# Altium PCB STM32F103C8T6.PcbDoc
Units mm, origin at the board's own origin, x right, y up, seen from the top; angles counter-clockwise.
Board outline 63.9 x 36.3 mm, 2 copper layers (Top Layer, Bottom Layer); 36 components, 50 nets, 189 pads, 28 vias.
Unrouted connection lines stored in the file: 1.
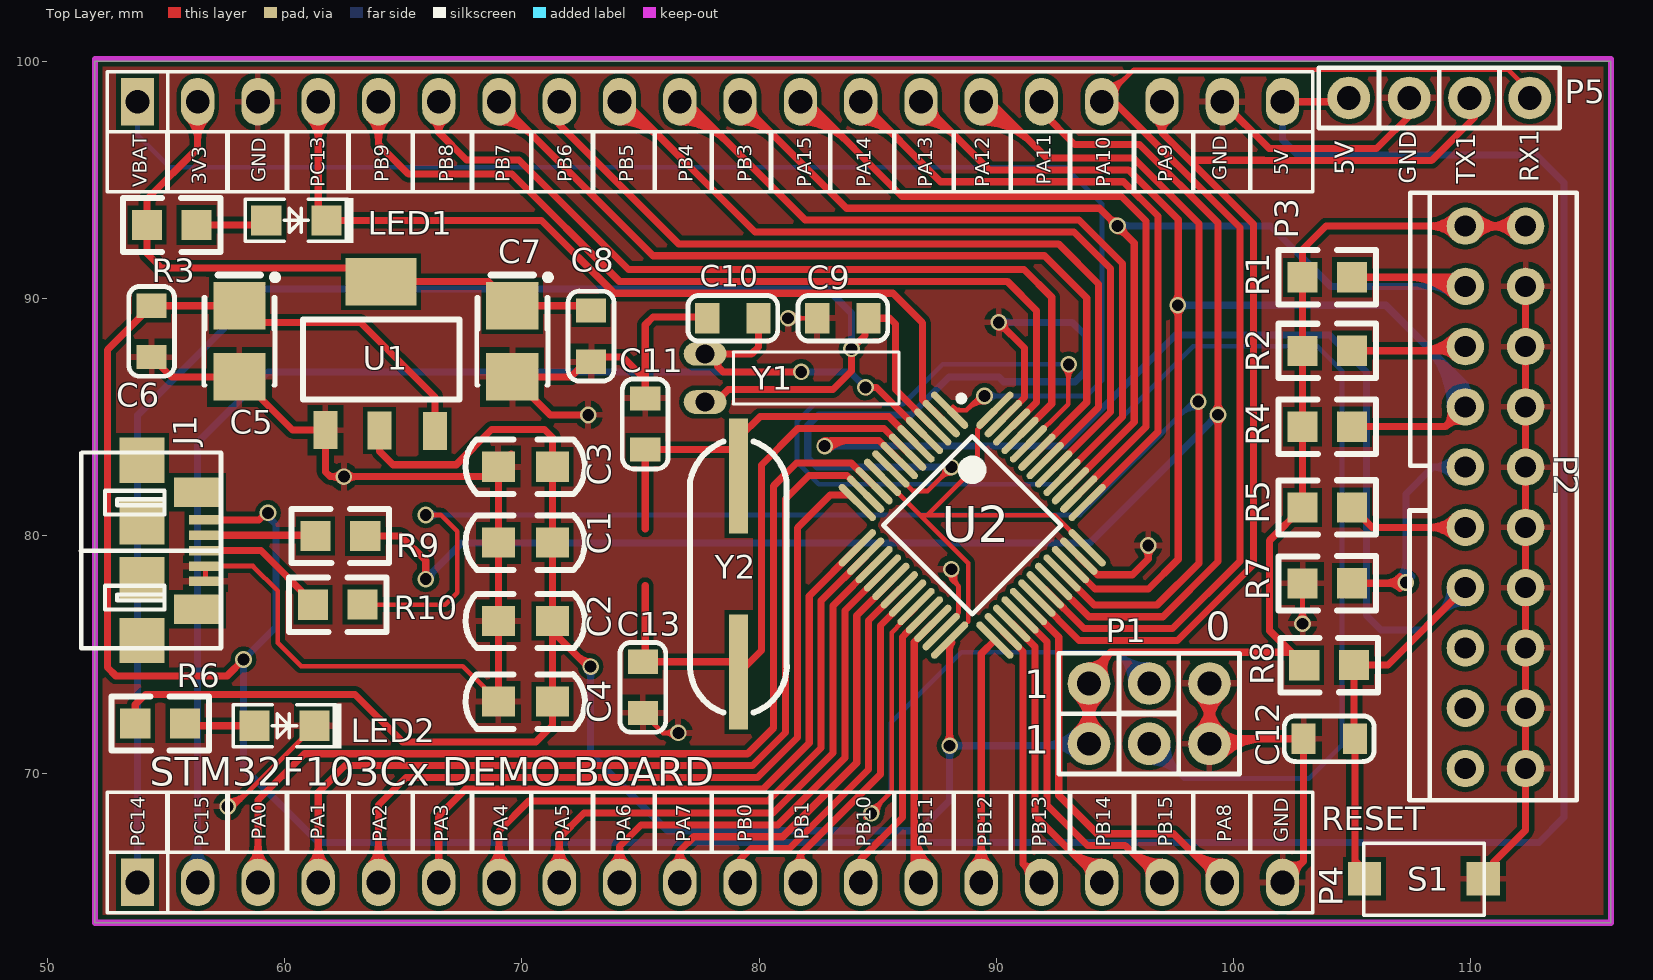
[diagram p0: Top Layer view]
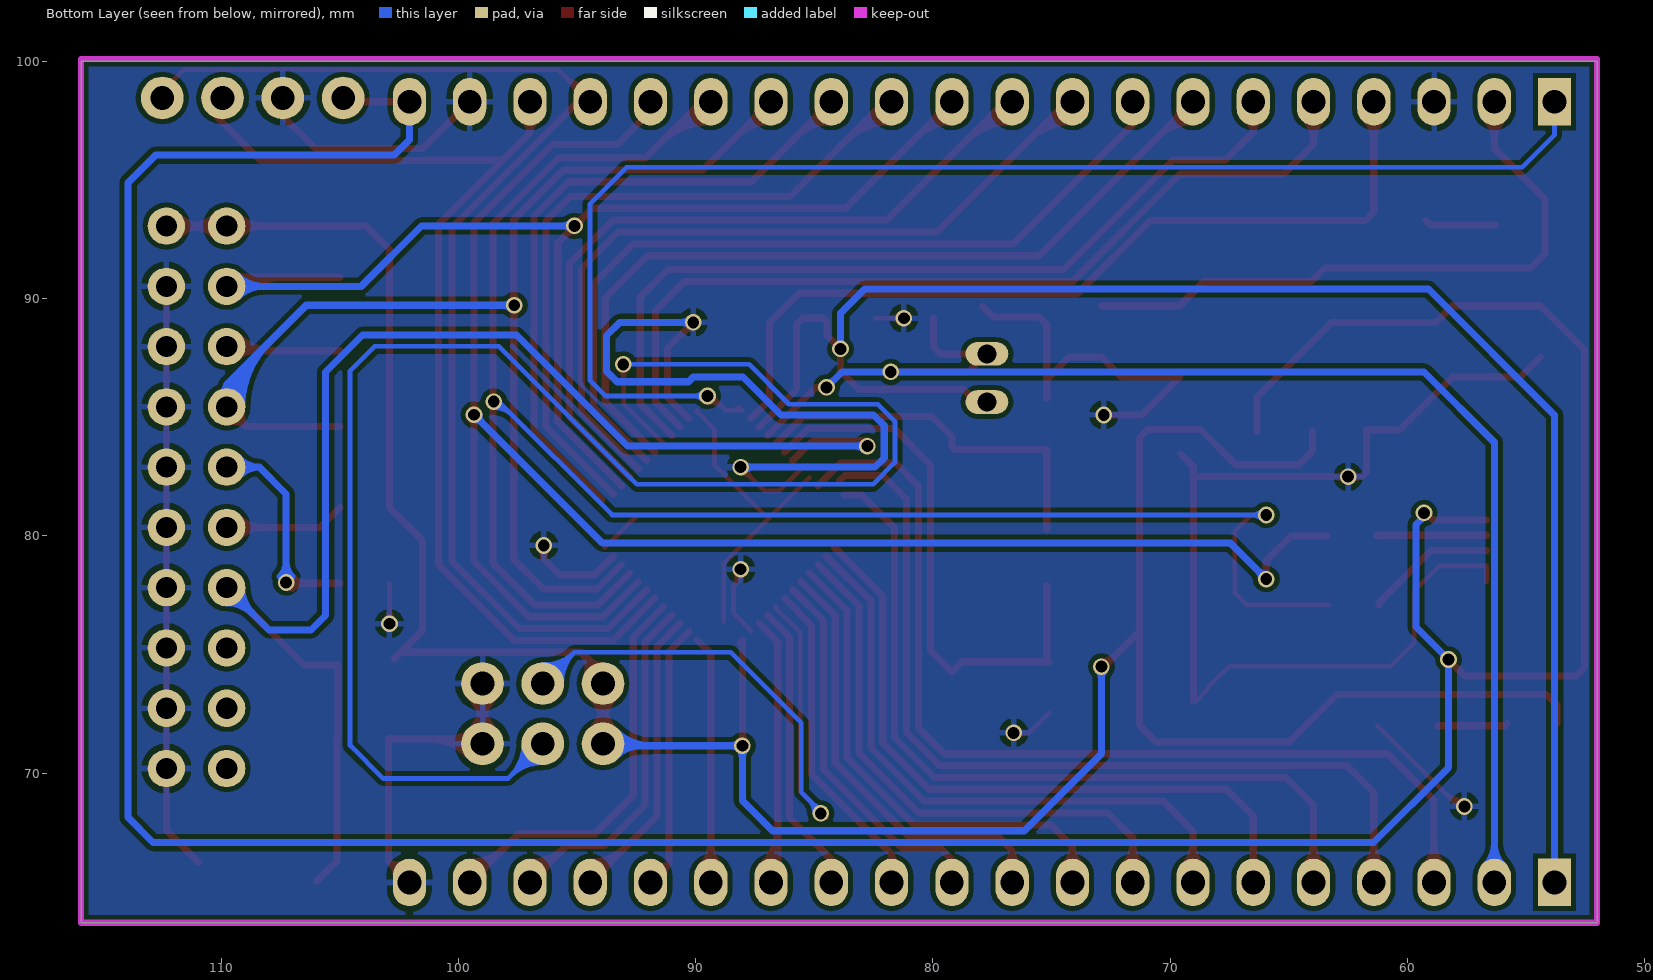
[diagram p1: Bottom Layer view, seen from below]
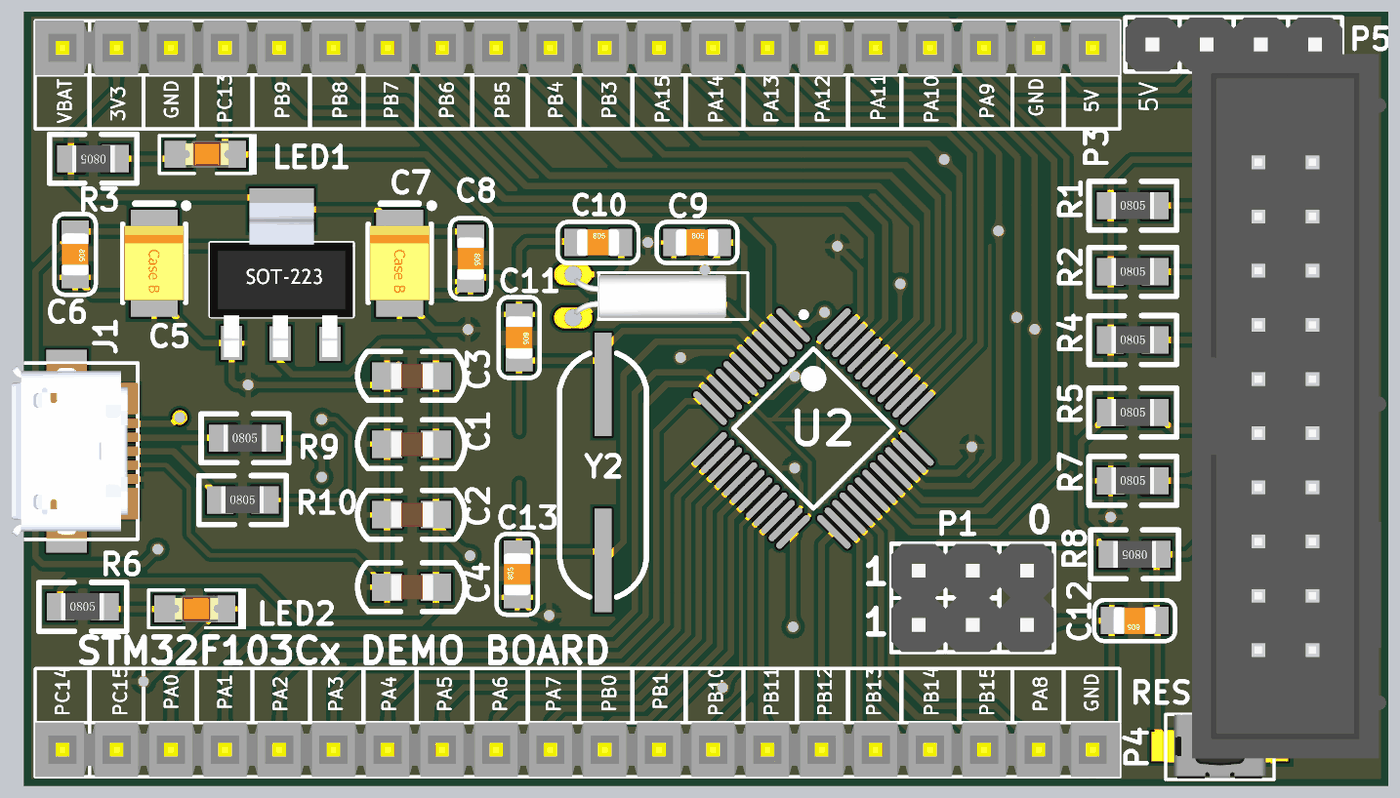
[diagram p2: 3D render of the assembled board from above, using the file's embedded part models]

## Layer stack, top to bottom
Top Solder: solder mask 0.0102, Solder Resist, Dk 3.5
Top Layer: signal copper 0.0356
Dielectric 1: dielectric 0.32, FR-4, Dk 4.8
Bottom Layer: signal copper 0.0356
Bottom Solder: solder mask 0.0102, Solder Resist, Dk 3.5

## Board outline
52.003,63.7 115.9,63.7 115.9,100 52.003,100

## Design rules (kind name [scope] priority, off if disabled: settings)
Clearance [All] p1: gap=0.2 ignorepadtopadclearanceinfootprint=FALSE except(0: Arc-Hole Track-Hole SMDPad-Hole THPad-Hole Via-Hole Fill-Hole Poly-Hole Region-Hole Text-Hole)
ComponentClearance [All] p1 off: gap=0.254 collisioncheckmode=3 verticalgap=0.254 showdistances=FALSE
PolygonConnect [All] p1: connectstyle=Relief reliefconductorwidth=0.254 reliefentries=4 polygonreliefangle="90 Angle" airgapwidth=0.254
RoutingVias [All] p1: holewidth=0.711 width=1.27 viastyle="Through Hole" minholewidth=0.711 minwidth=1.27 maxholewidth=0.711 maxwidth=1.27
SolderMaskExpansion [All] p1: expansion=0.102
Width [All] p1: maxlimit=0.7 minlimit=0.2 preferedwidth=0.3
29 further rules are at their usual default settings.

## Components (designator, comment, footprint, x,y, rotation, side; value= is the part's Value field where it differs from the comment)
C1 "104" 0805C 70.154,79.718 r180 top
C2 "104" 0805C 70.154,76.418 r180 top
C3 "104" 0805C 70.154,82.918 r180 top
C4 "104" 0805C 70.154,73.018 r180 top
C5 "10pF" SMT_C_Tantalum_B 58.1,88.2 r270 top
C6 "104" 0805-0C 54.4,89.7 r270 top
C7 "10pF" SMT_C_Tantalum_B 69.6,88.2 r270 top
C8 "104" 0805-0C 72.918,89.503 r270 top
C9 "20pF" 0805-0C 82.449,89.175 r0 top
C10 "20pF" 0805-0C 77.814,89.175 r0 top
C11 "20pF" 0805-0C 75.2,85.8 r270 top
C12 "104" 0805-0C 105.106,71.454 r180 top
C13 "20pF" 0805-0C 75.1,72.541 r90 top
J1 "USB-Micro" USB-MICRO贴片 55.334,79.393 r270 top
LED1 "SMT_LED_0805" 0805LED1 60.5,93.3 r0 top
LED2 "SMT_LED_0805" 0805LED1 60,72 r0 top
P1 "BOOT" 2.54排针2X3 93.899,71.242 r0 top
P2 "JTAG" 2.54简易牛角座20P 109.76,93.06 r270 top
P3 "Header20" 2.54排针1X20 53.8,98.3 r0 top
P4 "Header20" 2.54排针1X20 53.8,65.4 r0 top
P5 "Header4" 2.54排针1X4 104.854,98.458 r180 top
R1 "10K" R0805 102.9,90.9 r0 top
R2 "10K" R0805 102.9,87.8 r0 top
R3 "1K" R0805 56.29,93.105 r180 top
R4 "10K" R0805 102.9,84.6 r0 top
R5 "10K" R0805 102.9,81.2 r0 top
R6 "1K" R0805 53.71,72.095 r0 top
R7 "10K" R0805 102.9,78 r0 top
R8 "10K" R0805 105.063,74.557 r180 top
R9 "20R" R0805 61.31,79.995 r0 top
R10 "20R" R0805 61.2,77.1 r0 top
S1 "SW-PB" 按键微动开关2 108.017,65.532 r180 top
U1 "AMS1117" AMS1117 64.2,87.5 r0 top
U2 "STM32F103C8T6" LQF48_M 88.982,80.455 r315 top
Y1 "XTAL 32.768" AT26 80.389,86.669 r0 top
Y2 "8MHz" TP_8M 79.127,78.398 r90 top

## Footprints (in the part's own frame and the unit in brackets; to place one, negate y for a bottom-side part, rotate by r counter-clockwise, add the part's x,y. Pads: shape width x height; smd on the part's side, far side on the other; paste and mask are expansions set on the pad)
2.54排针1X4 [mm]
  round 1.8 hole 1: 1(-7.62,0) 2(-5.08,0) 3(-2.54,0) 4(0,0)
  silkscreen extent -8.89,-1.27 1.27,1.27, body extent -8.89,-1.27 1.27,1.27, height 2.5
2.54排针1X20 [mm]
  rect 1.4x2 hole 1: 1(0,0)
  oval 1.4x2 hole 1: 2(2.54,0) 3(5.08,0) 4(7.62,0) 5(10.16,0) 6(12.7,0) 7(15.24,0) 8(17.78,0) 9(20.32,0) 10(22.86,0) 11(25.4,0) 12(27.94,0) 13(30.48,0) 14(33.02,0) 15(35.56,0) 16(38.1,0) 17(40.64,0) 18(43.18,0) 19(45.72,0) 20(48.26,0)
  silkscreen extent -1.27,-1.27 49.53,1.27, body extent -1.27,-1.27 49.53,1.27, height 8.89
2.54排针2X3 [mm]
  round 1.8 hole 1: 1(0,0) 2(0,2.54) 3(2.54,0) 4(2.54,2.54) 5(5.08,2.54) 6(5.08,0)
  silkscreen extent -1.27,-1.27 6.35,3.81, body extent -1.27,-1.27 6.35,3.81, height 2.5
2.54简易牛角座20P [mil]
  round 62 hole 35: 1(0,0) 2(0,100) 3(100,0) 4(100,100) 5(200,0) 6(200,100) 7(300,0) 8(300,100) 9(400,0) 10(400,100) 11(500,0) 12(500,100) 13(600,0) 14(600,100) 15(700,0) 16(700,100) 17(800,0) 18(800,100) 19(900,0) 20(900,100)
  silkscreen extent -55,-93 953,185, body extent -195,-120 1105,238, height 344
0805-0C [mil]
  rect 40x50 smd: 1(0,0) 2(85,0)
  silkscreen extent -32,-38 117,38, body extent 3,-25 82,25, height 30
0805C [mil]
  rect 55x50 smd: 1(-45,0) 2(45,0)
  silkscreen extent -99,-45 99,45, body extent -40,-24 38,24, height 37
0805LED1 [mm]
  rect 1.27x1.27 smd: 1(-1.27,0) 2(1.27,0)
  silkscreen extent -2.16,-0.95 2.4,0.95, body extent -0.93,-0.62 1.09,0.64, height 1.1
AMS1117 [mm]
  rect 1x1.6 smd: 1(-2.475,-3.041) 2(-0.2,-3.058) 3(2.142,-3.071)
  rect 3x2 smd: 2(-0.129,3.216)
  silkscreen extent -3.43,-1.75 3.17,1.63, body extent -3.48,-3.68 3.22,3.52, height 1.85
AT26 [mm]
  oval 1.8x1 hole 0.8: 1(-2.667,-1.025) 2(-2.667,1.007)
  silkscreen extent -1.53,-1.11 5.51,1.09, body extent -2.62,-1.03 4.52,0.97, height 2.4
LQF48_M [mm]
  oval 2.1x0.3 smd: 1(-4.1,2.75) 2(-4.1,2.25) 3(-4.1,1.75) 4(-4.1,1.25) 5(-4.1,0.75) 6(-4.1,0.25) 7(-4.1,-0.25) 8(-4.1,-0.75) 9(-4.1,-1.25) 10(-4.1,-1.75) 11(-4.1,-2.25) 12(-4.1,-2.75) 25(4.1,-2.75) 26(4.1,-2.25) 27(4.1,-1.75) 28(4.1,-1.25) 29(4.1,-0.75) 30(4.1,-0.25) 31(4.1,0.25) 32(4.1,0.75) 33(4.1,1.25) 34(4.1,1.75) 35(4.1,2.25) 36(4.1,2.75)
  oval 0.3x2.1 smd: 13(-2.75,-4.1) 14(-2.25,-4.1) 15(-1.75,-4.1) 16(-1.25,-4.1) 17(-0.75,-4.1) 18(-0.25,-4.1) 19(0.25,-4.1) 20(0.75,-4.1) 21(1.25,-4.1) 22(1.75,-4.1) 23(2.25,-4.1) 24(2.75,-4.1) 37(2.75,4.1) 38(2.25,4.1) 39(1.75,4.1) 40(1.25,4.1) 41(0.75,4.1) 42(0.25,4.1) 43(-0.25,4.1) 44(-0.75,4.1) 45(-1.25,4.1) 46(-1.75,4.1) 47(-2.25,4.1) 48(-2.75,4.1)
  silkscreen extent -4.22,-2.65 2.65,3.57, body extent -3.5,-3.5 3.5,3.5, height 1.6
R0805 [mm] "1/8W"
  rect 1.27x1.27 smd: 1(0,0) 2(2.09,0.005)
  silkscreen extent -1.01,-1.14 3.1,1.15, body extent 0.04,-0.62 2.04,0.64, height 0.55
SMT_C_Tantalum_B [mm]
  rect 2x2.2 smd: 1(-1.5,0) 2(1.5,0)
  silkscreen extent -2.82,-1.5 1.85,1.63, body extent -1.75,-1.4 1.75,1.4, height 1.9
TP_8M [mm]
  rect 4.85x0.8 smd: 1(-4.125,0) 2(4.125,0)
  silkscreen extent -5.84,-2.04 5.59,2.03, body extent -5.8,-2.4 5.8,2.4, height 4
USB-MICRO贴片 [mm]
  rect 1.9x1.9 smd: 0(-3.797,-1.334) 0(-1.206,-1.334) 0(1.232,-1.333) 0(3.797,-1.333)
  rect 1.25x2 smd: 0(-2.451,1.003) 0(2.476,1.003)
  rect 0.4x1.4 smd: 1(-1.283,1.333) 2(-0.635,1.333) 3(0.013,1.333) 4(0.66,1.334) 5(1.308,1.334)
  silkscreen extent -4.13,-3.91 4.13,1.99, body extent -4.1,-3.91 4.1,2.02, height 2.77
按键微动开关2 [mm]
  rect 1.4x1.4 / inner round 0 / far side round 0 all layers, no hole: 1(-2.5,-0.024) 2(2.5,-0.024)
  silkscreen extent -2.54,-1.52 2.54,1.52, body extent -2.5,-1.52 2.5,1.48, height 2.1

## Part data
C1 C2 C3 C4: library part C0805
C5 C7: library part SMT_C_Tantalum_B, "Capacitor, SM Tantalum; Body 3.5 x 2.8 mm (LxW typ)"
C6 C8 C9 C10 C11 C12 C13: library part SMT_C_0805, "Surface mount capacitor 0805"
LED1 LED2: "SMT LED"
P1: library part PIN-6
P2: library part PIN-20
P3 P4: library part SIP-20
P5: library part SIP-4
R1 R2 R3 R4 R5 R6 R7 R8 R9 R10: library part R0805
S1: library part 微动开关2P
U2: "ARM 32bit LQFP48"
Y2: library part XTAL

## Via types
v1: diameter 0.7, hole 0.5, Top Layer to Bottom Layer, tented both sides, 26 vias
v2: diameter 0.7, hole 0.5, Top Layer to Bottom Layer, 2 vias

## Nets (pads, with @x,y where several pads share a name; then routed paths per layer and width w, separated by ;. In a path a pad name is that pad's centre, name@x,y a point inside that pad or via, vN(x,y) a via of type N, cw(c..) or ccw(c..) an arc to the next point about the centre after c; other vN are vias at no path point)
5V: C5.1 C6.1 J1.1 P3.20 P5.4 U1.3 | length 152.3
  Top Layer w0.3: J1.1 58.927,80.676 59.222,80.971 v2(59.302,80.971) ; v1(58.272,74.794) 57.584,74.106 52.888,74.106 52.544,74.45 52.544,87.844 C6.1 C5.1 58.8,89 63.2,89 66.342,85.858 U1.3 ; P3.20 104.806,98.3 P5.4@104.848,98.342
  Bottom Layer w0.3: v2@59.312,80.811 59.642,80.482 59.642,76.164 v1(58.272,74.794) 58.272,70.235 61.43,67.077 112.859,67.077 113.912,68.13 113.912,94.896 112.762,96.047 102.709,96.047 102.06,96.695 P3.20
BOOT0: P1.3 U2.44 | length 77.6
  Top Layer w0.2: U2.44 93.026,85.56 93.026,87.063 v1@93.215,87.252 ; v1@92.866,87.051 cw(c92.48,86.665) 93.026,86.665 ; v1@92.941,87.125 cw(c92.735,86.92) v1@93.026,86.92 ; 93.026,86.564 cw(c93.715,86.564) v1@93.228,87.051
  Bottom Layer w0.2: v1(93.047,87.231) 87.745,87.231 86.064,85.55 82.314,85.55 81.6,84.836 81.6,83.097 82.522,82.175 92.471,82.175 98.289,87.993 103.53,87.993 104.564,86.959 104.564,71.171 103.166,69.774 97.908,69.774 P1.3 ; P1.3@96.439,70.442 cw(c96.439,68.511) 97.805,69.877 cw(c99.171,71.242) P1.3@97.239,71.242 ; P1.3@96.439,70.642 cw(c96.439,69.194) 97.464,70.218 cw(c98.488,71.242) P1.3@97.039,71.242 ; P1.3@96.439,70.842 cw(c96.439,69.877) 97.122,70.559 cw(c97.805,71.242) P1.3@96.839,71.242
BOOT1: P1.4 U2.20 | length 35.1
  Top Layer w0.2: v1@84.468,68.124 84.656,68.312 v1(84.726,68.312) 84.726,68.382 85.587,69.243 85.587,75.929 86.014,76.355 86.613,76.955 U2.20 ; v1@84.726,68.567 ccw(c84.726,69.015) 85.042,68.699 ; v1@84.981,68.312 cw(c85.768,68.312) 85.212,68.868
  Bottom Layer w0.2: v1(84.726,68.312) 84.726,68.382 85.543,69.199 85.543,72.12 88.519,75.096 95.112,75.096 ; v1@84.726,68.567 ccw(c84.726,69.015) 85.042,68.699 ; v1@84.981,68.312 cw(c85.768,68.312) 85.212,68.868 ; 95.438,74.769 ccw(c96.375,75.707) P1.4@96.419,74.382 ; 95.446,74.761 cw(c94.497,73.812) P1.4@95.839,73.791 ; P1.4@95.639,73.794 ccw(c93.838,73.822) 95.112,75.095 ; 95.764,74.443 ccw(c96.396,75.076) P1.4@96.426,74.182 ; 95.781,74.427 cw(c95.155,73.802) P1.4@96.039,73.788 ; P1.4@96.413,74.582 cw(c96.355,76.338) 95.112,75.095 ; P1.4 96.425,73.782 95.112,75.096
GND: C1.2 C2.2 C3.2 C4.2 C5.2 C6.2 C7.2 C8.2 C9.1 C10.1 C11.1 C12.2 C13.1 J1.4 J1.5 LED2.2 P1.5 P1.6 P2.4 P2.6 P2.8 P2.10 P2.12 P2.14 P2.16 P2.18 P2.20 P3.3 P3.19 P4.20 P5.3 R7.1 S1.1 U1.1 U2.8 U2.23 U2.35 U2.47 | length 186.3
  Top Layer w0.2: J1.5 J1.4 58.67,78.733 59.717,77.686 59.717,75.493 60.698,74.512 67.516,74.512 68.412,73.616 68.412,73.553 68.947,73.018 C4.2 ; v1(57.6,68.6) 57.87,68.6 LED2.2 ; v1@57.6,68.656 ccw(c57.6,69.442) 58.156,68.886 ; v1@57.6,68.856 ccw(c57.6,70.125) 58.497,69.227 ; C13.1 75.941,71.7 v1(76.6,71.7) ; v1@76.419,71.519 ccw(c75.983,71.083) 75.983,71.7 ccw(c75.983,72.317) v1@76.419,71.881 ; v1(81.225,89.175) C9.1 ; v1@81.406,88.994 cw(c81.842,88.558) 81.842,89.175 cw(c81.842,89.792) v1@81.406,89.356 ; U2.8 86.476,81.9 87.1,81.9 v1(88.1,82.9) ; U2.23 87.674,76.036 88.407,76.768 88.407,77.874 ; v1@87.844,82.9 cw(c87.227,82.9) 87.664,82.464 cw(c88.1,82.027) v1@88.1,82.644 ; v1@87.983,78.373 cw(c87.884,78.181) 88.1,78.181 ; v1(88.1,78.6) 88.1,78.181 ; v1@88.149,78.573 ccw(c88.522,78.364) 88.22,78.061 ; v1@88.217,78.373 ccw(c88.316,78.181) 88.1,78.181 ; v1@88.323,78.475 ccw(c88.762,78.23) 88.407,77.874 ; v1@102.719,76.481 ccw(c102.283,76.917) 102.9,76.917 ccw(c103.517,76.917) v1@103.081,76.481 ; v1@102.9,76.1 v1(102.9,76.3) R7.1 ; 88.1,78.181 88.407,77.874
  Top Layer w0.3: C6.2 55.241,86.7 C5.2 60.341,84.459 U1.1 61.725,82.7 61.925,82.5 C3.2@69.011,82.5 ; v1@62.355,82.355 ccw(c62.004,82.004) 62.004,82.5 ccw(c62.004,82.996) v1@62.355,82.645 ; v1@62.645,82.355 cw(c62.996,82.004) 62.996,82.5 cw(c62.996,82.996) v1@62.645,82.645 ; C4.2 C2.2 C1.2 C3.2@69.011,82.5 ; C3.2@69.057,82.5 C3.2@69.011,82.5 ; C3.2@69.554,83.461 C3.2 C3.2@69.011,82.5 ; v1(72.8,85.1) 72.655,85.1 72.304,85.1 71.2,85.1 C7.2 72.059,86.7 72.9,87.541 74.259,87.541 75.2,86.6 ; C11.1 75.2,86.6 ; C10.1@77.9,89.674 77.607,89.381 77.451,89.225 75.525,89.225 75.2,88.9 75.2,86.6 ; v1@90.1,88.794 cw(c90.1,88.298) 90.451,88.649 cw(c90.802,89) v1@90.306,89 ; v1(90.1,89) 91.182,87.918 91.182,85.837 U2.47 ; U2.35 94.255,78.364 95.736,78.364 96.4,79.028 v1(96.4,79.6) ; v1@96.255,79.455 cw(c95.904,79.104) 96.4,79.104 cw(c96.896,79.104) v1@96.545,79.455 ; P1.6@98.449,71.773 ccw(c97.169,73.053) 98.979,73.053 ccw(c100.79,73.053) 99.51,71.773 ccw(c100.28,72.542) 100.28,71.454 ; P1.5@98.449,73.252 cw(c97.169,71.972) 98.979,71.972 cw(c100.79,71.972) P1.5@99.51,73.252 ; P1.6@98.661,71.56 ccw(c97.893,72.329) 98.979,72.329 ccw(c100.066,72.329) P1.6@99.298,71.56 ; P1.5@98.661,73.464 cw(c97.893,72.696) 98.979,72.696 cw(c100.066,72.696) P1.5@99.298,73.464 ; P1.5 P1.6 99.191,71.454 C12.2 102.947,66.287 ; P1.6@99.298,70.924 cw(c100.576,69.645) 100.576,71.454 ; P1.6@99.51,70.712 cw(c101.301,68.921) 101.301,71.454 ; P3.19 101.496,96.324 106.024,96.324 P5.3@107.51,97.81 ; P4.20 102.947,66.287 ; P4.20@102.313,66.188 ccw(c102.563,66.67) 102.947,66.287 ; P4.20@102.61,65.7 cw(c103.214,65.7) 102.787,66.127 ; S1.1@110.949,66.25 112.3,67.601 P2.20 P2.18 P2.16 P2.14 P2.12 P2.10 P2.8 P2.6 P2.4
  Bottom Layer w0.3: v1@87.955,82.755 ccw(c87.604,82.404) 87.604,82.9 ccw(c87.604,83.396) v1@87.955,83.045 ; v1(88.1,82.9) 82.433,82.9 82.05,83.283 82.05,84.65 82.5,85.1 86.4,85.1 88,86.7 90.1,86.7 90.3,86.5 93.313,86.5 93.752,86.939 93.752,88.448 93.2,89 v1(90.1,89) ; v1@90.245,88.855 cw(c90.596,88.504) 90.596,89 cw(c90.596,89.496) v1@90.245,89.145
  other v1: 62.5,82.5
JDTDI: P2.5 R2.2 | length 8.4
  Top Layer w0.3: R2.2 109.585,87.805 P2.5 ; 107.799,87.805 ccw(c107.799,89.941) P2.5@109.309,88.431 ; 108.523,87.805 ccw(c108.523,89.217) P2.5@109.521,88.219 ; 108.643,87.805 cw(c108.643,86.863) P2.5@109.309,87.529
JTCK: P3.13 U2.37 | length 30.8
  Top Layer w0.3: P3.13@84.28,97.45 cw(c84.28,95.398) 85.731,96.849 ; P3.13@84.28,97.75 cw(c84.28,96.422) 85.219,97.361 ; P3.13 87.651,94.929 95.359,94.929 96.808,93.48 96.808,84.392 U2.37@93.936,81.52 ; P3.13@84.83,98 ccw(c85.434,98) 85.007,97.573
JTD1: P3.12 U2.38 | length 34.1
  Top Layer w0.3: P3.12@81.74,97.45 cw(c81.74,94.682) 83.697,96.639 ; P3.12@81.74,97.75 cw(c81.74,95.707) 83.185,97.152 ; P3.12@81.74,98.05 cw(c81.74,96.731) 82.673,97.664 ; P3.12 82.036,98.3 86.026,94.311 95.271,94.311 96.308,93.273 96.308,84.599 U2.38
JTDO: P2.11 R5.2 | length 8.8
  Top Layer w0.3: R5.2 105.836,80.36 P2.11 ; P2.11@109.309,79.909 ccw(c108.221,78.821) 108.221,80.36 ccw(c108.221,81.899) P2.11@109.309,80.811 ; P2.11@109.521,80.121 ccw(c108.945,79.545) 108.945,80.36 ccw(c108.945,81.175) P2.11@109.521,80.599
JTMS: P2.7 P3.14 R4.2 U2.34 | length 67.7
  Top Layer w0.3: P3.14@86.82,97.45 cw(c86.82,95.398) 88.271,96.849 ; P3.14@86.82,97.75 cw(c86.82,96.422) 87.759,97.361 ; P3.14 89.691,95.429 95.566,95.429 97.662,93.334 97.662,79.018 96.407,77.763 94.149,77.763 U2.34 ; P3.14@87.37,98 ccw(c87.974,98) 87.547,97.573 ; v1@97.496,89.576 cw(c97.096,89.176) 97.662,89.176 ; v1@97.496,89.867 ccw(c97.096,90.267) 97.662,90.267 ; 97.662,89.274 cw(c98.089,89.274) v1@97.787,89.576 ; 97.662,90.168 ccw(c98.089,90.168) v1@97.787,89.867 ; R4.2 108.925,84.605 ; P2.7@109.136,85.31 cw(c108.377,85.153) 108.925,84.605 ; P2.7@109.63,84.816 ccw(c109.473,84.057) 108.925,84.605 ; P2.7 108.925,84.605
  Bottom Layer w0.3: v1(97.642,89.721) 106.41,89.721 109.76,86.371 P2.7 ; v1@97.787,89.576 cw(c98.138,89.225) 98.138,89.721 cw(c98.138,90.218) v1@97.787,89.867 ; 108.013,88.118 cw(c105.335,85.44) P2.7@109.123,85.44 ; 108.525,87.606 cw(c106.359,85.44) P2.7@109.423,85.44 ; 109.037,87.094 cw(c107.384,85.44) P2.7@109.723,85.44 ; 109.55,86.582 cw(c108.408,85.44) P2.7@110.023,85.44
JTRST: P2.3 P3.11 R1.2 U2.39 | length 65.2
  Top Layer w0.3: P3.11@79.2,97.45 cw(c79.2,95.398) 80.651,96.849 ; P3.11@79.2,97.75 cw(c79.2,96.422) 80.139,97.361 ; P3.11 83.689,93.811 94.339,93.811 95.808,92.342 95.808,84.806 U2.39 ; P3.11@79.75,98 ccw(c80.354,98) 79.927,97.573 ; 94.716,93.434 ccw(c95.104,93.821) v1@95.104,93.273 ; 94.768,93.382 cw(c94.454,93.068) v1@94.898,93.068 ; v1@95.104,92.862 cw(c95.104,92.417) 95.418,92.732 ; v1@95.31,93.068 ccw(c95.858,93.068) 95.47,92.68 ; R1.2 109.375,90.905 P2.3 ; 107.292,90.905 cw(c107.292,88.052) P2.3@109.309,90.069 ; 108.016,90.905 cw(c108.016,88.776) P2.3@109.521,90.281 ; 108.74,90.905 cw(c108.74,89.5) P2.3@109.734,90.494
  Bottom Layer w0.3: v1(95.104,93.068) 101.545,93.068 104.092,90.52 P2.3 ; v1@95.249,92.922 cw(c95.6,92.571) 95.6,93.068 cw(c95.6,93.564) v1@95.249,93.213 ; P2.3@109.309,90.069 ccw(c108.221,88.981) 108.221,90.52 ccw(c108.221,92.059) P2.3@109.309,90.971 ; P2.3@109.521,90.281 ccw(c108.945,89.705) 108.945,90.52 ccw(c108.945,91.335) P2.3@109.521,90.759
NetJ1_2: J1.2 R9.1 | length 4.7
  Top Layer w0.3: J1.2 61.276,80.028 R9.1
NetJ1_3: J1.3 R10.1 | length 5.5
  Top Layer w0.3: J1.3 59.006,79.381 61.2,77.187 R10.1
NetLED1_1: LED1.1 R3.1 | length 3
  Top Layer w0.3: R3.1 59.035,93.105 LED1.1
NetLED2_1: LED2.1 R6.2 | length 3
  Top Layer w0.3: R6.2 55.9,72 LED2.1
NetP2_9: P2.9 R7.2 | length 13.5
  Top Layer w0.3: R7.2 v1@107.108,78.005 ; 106.335,78.005 ccw(c106.335,78.959) v1@107.01,78.285 ; 106.489,78.005 cw(c106.489,77.269) v1@107.01,77.79
  Bottom Layer w0.3: v1@107.01,78.285 ccw(c106.412,78.882) 107.257,78.882 ccw(c108.102,78.882) v1@107.505,78.285 ; v1(107.257,78.037) 107.257,81.768 108.389,82.9 ; P2.9@109.273,82.489 ccw(c108.389,81.744) 108.389,82.9 ; P2.9@109.273,83.311 cw(c108.389,84.056) 108.389,82.9 ; P2.9 108.389,82.9
NRST: C12.1 P2.13 R8.1 S1.2 U2.7 | length 66.2
  Top Layer w0.3: v1@82.62,83.926 cw(c82.863,83.683) v1@82.863,84.027 ; v1@82.694,83.852 cw(c83.118,83.428) 83.118,84.027 ; v1(82.761,83.785) 83.003,84.027 85.056,84.027 U2.7 ; v1@82.906,83.639 cw(c83.842,82.704) 83.842,84.027 ; S1.2@105.964,65.457 105.588,65.833 105.106,66.315 C12.1 105.063,71.496 R8.1 106.497,74.557 P2.13
  Bottom Layer w0.3: v1(82.761,83.785) 92.866,83.785 97.55,88.468 104.033,88.468 105.593,86.908 105.593,76.65 106.201,76.042 107.982,76.042 P2.13 ; v1@82.906,83.639 cw(c83.257,83.288) 83.257,83.785 cw(c83.257,84.281) v1@82.906,83.93 ; P2.13@109.123,77.82 cw(c107.584,77.82) 108.672,76.732 cw(c109.76,75.644) P2.13@109.76,77.183 ; P2.13@109.423,77.82 cw(c108.608,77.82) 109.184,77.244 cw(c109.76,76.668) P2.13@109.76,77.483
OSC_IN: C11.2 U2.5 Y2.2 | length 16
  Top Layer w0.3: 75.2,80.3 C11.2 79.063,83.641 79.2,83.778 79.2,84.192 80.035,85.027 85.47,85.027 U2.5
OSC_OUT: C13.2 U2.6 Y2.1 | length 23.8
  Top Layer w0.3: 75.2,77.9 75.2,74.8 C13.2 78.775,74.7 79.2,74.275 80.096,75.171 80.096,82.997 81.627,84.527 85.263,84.527 U2.6
PA0: P4.3 U2.10 | length 43.8
  Top Layer w0.3: P4.3@58.491,66.089 ccw(c57.552,67.028) 58.88,67.028 ccw(c60.208,67.028) P4.3@59.269,66.089 ; P4.3 58.88,68.869 60.836,70.824 79.518,70.824 80.614,71.919 80.614,82.113 81.578,83.078 83.884,83.078 84.444,82.518 U2.10
PA1: P4.4 U2.11 | length 39.8
  Top Layer w0.3: P4.4@61.031,66.089 ccw(c60.092,67.028) 61.42,67.028 ccw(c62.748,67.028) P4.4@61.809,66.089 ; P4.4 61.42,69.192 62.552,70.324 79.726,70.324 81.114,71.712 81.114,81.555 82.105,82.546 83.709,82.546 U2.11@83.944,82.311
PA2: P4.5 U2.12 | length 35.7
  Top Layer w0.3: P4.5@63.571,66.089 ccw(c62.632,67.028) 63.96,67.028 ccw(c65.288,67.028) P4.5@64.349,66.089 ; P4.5 63.96,68.659 65.126,69.824 79.933,69.824 81.614,71.505 81.614,80.343 83,81.729 U2.12@83.748,81.729
PA3: P4.6 U2.13 | length 28.2
  Top Layer w0.3: P4.6@66.5,65.918 66.5,68.202 67.622,69.324 80.167,69.324 82.114,71.271 82.114,77.476 U2.13
PA4: P4.7 U2.14 | length 28.1
  Top Layer w0.3: P4.7@68.651,66.089 ccw(c67.712,67.028) 69.04,67.028 ccw(c70.368,67.028) P4.7@69.429,66.089 ; P4.7 69.04,67.573 70.291,68.824 80.374,68.824 82.614,71.064 82.614,77.269 U2.14
PA5: P4.8 U2.15 | length 25.6
  Top Layer w0.3: P4.8@71.191,66.089 ccw(c70.252,67.028) 71.58,67.028 ccw(c72.908,67.028) P4.8@71.969,66.089 ; P4.8 71.58,67.285 72.619,68.324 80.581,68.324 83.114,70.857 83.114,77.062 U2.15
PA6: P4.9 U2.16 | length 22.8
  Top Layer w0.3: P4.9@73.756,66.113 ccw(c73.047,66.918) 74.12,66.918 ; P4.9 74.12,66.918 ; P4.9@74.484,66.113 cw(c75.193,66.918) 74.12,66.918 ; U2.16 83.614,76.854 83.614,70.65 80.788,67.824 75.026,67.824 74.12,66.918
PA7: P4.10 U2.17 | length 19.9
  Top Layer w0.3: P4.10@76.35,66.154 ccw(c75.949,66.741) 76.66,66.741 ; P4.10 76.66,66.741 ; P4.10@76.97,66.154 cw(c77.371,66.741) 76.66,66.741 ; U2.17 84.114,76.647 84.114,70.443 80.995,67.324 77.243,67.324 76.66,66.741
PA8: P4.19 U2.29 | length 20
  Top Layer w0.3: U2.29 92.627,75.749 92.627,69.073 94.248,67.453 97.467,67.453 P4.19 ; 98.069,66.851 ccw(c99.52,68.302) P4.19@99.52,66.25 ; 98.581,66.339 ccw(c99.52,67.278) P4.19@99.52,65.95 ; 98.793,66.127 cw(c98.366,65.7) P4.19@98.97,65.7
PA9: P3.18 P5.2 U2.30 | length 46.4
  Top Layer w0.3: U2.30 93.485,75.598 97.633,75.598 100.83,78.794 100.83,93.139 98.137,95.831 ; P3.18@96.681,97.538 cw(c96.325,96.989) 96.98,96.989 ; P3.18 96.98,96.989 ; P3.18@97.279,97.538 ccw(c97.635,96.989) 96.98,96.989 ; P5.2@110.152,97.632 108.343,95.824 101.289,95.824 101.282,95.831 98.137,95.831 ; 96.98,96.989 98.137,95.831
PA10: P3.17 P5.1 U2.31 | length 53.5
  Top Layer w0.2: P3.17 95.79,99.65 104.349,99.65 104.357,99.658 105.351,99.658 105.359,99.65 106.889,99.65 106.897,99.658 107.891,99.658 107.899,99.65 109.429,99.65 109.437,99.658 110.431,99.658 110.439,99.65 111.572,99.65 P5.1@112.403,98.82 ; P3.17@94.461,98.799 ccw(c94.559,99.699) 95.199,99.059 ; P3.17@94.483,98.998 ccw(c94.616,100.233) 95.494,99.354 ; P3.17@95.04,98.6 cw(c95.764,98.6) 95.252,99.112
  Top Layer w0.3: U2.31 93.692,76.098 97.426,76.098 100.264,78.936 100.264,92.998 94.961,98.3 P3.17
PA11: P3.16 R9.2 U2.32 | length 75.7
  Top Layer w0.3: R9.2 64.914,80 65.95,78.964 v1(65.95,78.183) ; P3.16 91.9,97.896 93.295,96.501 96.036,96.501 99.34,93.198 v1(99.34,85.11) 99.34,78.919 97.019,76.598 93.9,76.598 U2.32 ; v1@99.195,84.964 cw(c98.844,84.613) 99.34,84.613 cw(c99.836,84.613) v1@99.485,84.964 ; v1@99.195,85.255 ccw(c98.844,85.606) 99.34,85.606 ccw(c99.836,85.606) v1@99.485,85.255
  Bottom Layer w0.3: v1(65.95,78.183) 67.468,79.7 93.93,79.7 v1(99.34,85.11) ; v1@65.95,78.388 ccw(c65.95,78.885) 66.301,78.534 ccw(c66.652,78.183) v1@66.156,78.183 ; v1@99.134,85.11 cw(c98.638,85.11) 98.989,84.759 cw(c99.34,84.408) v1@99.34,84.904
PA12: P3.15 R10.2 U2.33 | length 83.3
  Top Layer w0.2: R10.2 66.764,77.105 67.275,77.616 67.275,80.196 66.585,80.886 v1(65.95,80.886)
  Top Layer w0.3: P3.15@89.36,97.45 cw(c89.36,94.456) 91.477,96.573 ; P3.15@89.36,97.75 cw(c89.36,95.48) 90.965,97.085 ; P3.15@89.36,98.05 cw(c89.36,96.504) 90.453,97.597 ; P3.15 89.75,98.3 92.121,95.929 95.773,95.929 98.532,93.171 98.532,78.851 96.779,77.098 94.107,77.098 U2.33
  Bottom Layer w0.2: v1(65.95,80.886) 93.519,80.886 98.298,85.664 v1(98.504,85.664) ; v1@66.131,80.705 cw(c66.567,80.268) 66.567,80.886 cw(c66.567,81.503) v1@66.131,81.066 ; 97.716,85.083 cw(c98.504,84.295) v1@98.504,85.409 ; 98.058,85.424 cw(c98.504,84.978) v1@98.504,85.609
PB0: P4.11 U2.18 | length 16.1
  Top Layer w0.3: P4.11 79.2,66.372 79.653,66.824 81.274,66.824 84.614,70.164 84.614,76.44 U2.18
PB1: P4.12 U2.19 | length 14.8
  Top Layer w0.3: P4.12@81.497,66.194 ccw(c81.306,66.583) 81.74,66.583 ; P4.12 81.74,66.583 ; P4.12@81.983,66.194 cw(c82.174,66.583) 81.74,66.583 ; U2.19 85.114,76.233 85.114,69.957 81.74,66.583
PB4: P3.10 U2.40 | length 36.4
  Top Layer w0.3: P3.10@76.66,97.45 cw(c76.66,94.68) 78.619,96.639 ; P3.10@76.66,97.75 cw(c76.66,95.704) 78.107,97.151 ; P3.10@76.66,98.05 cw(c76.66,96.728) 77.595,97.663 ; P3.10 76.957,98.3 81.947,93.311 93.479,93.311 95.308,91.482 95.308,85.014 U2.40
PB5: P3.9 U2.41 | length 37.4
  Top Layer w0.3: P3.9@74.12,97.45 cw(c74.12,94.873) 75.942,96.695 ; P3.9@74.12,97.75 cw(c74.12,95.897) 75.43,97.207 ; P3.9@74.12,98.05 cw(c74.12,96.922) 74.918,97.719 ; P3.9 74.337,98.3 79.827,92.811 93.272,92.811 94.808,91.275 94.808,85.221 U2.41
PB6: P3.8 U2.42 | length 34.8
  Top Layer w0.3: P3.8 71.58,97.339 76.609,92.311 92.622,92.311 94.308,90.624 94.308,85.428 U2.42
PB7: P3.7 U2.43 | length 38.7
  Top Layer w0.3: P3.7@69.04,97.45 cw(c69.04,95.398) 70.491,96.849 ; P3.7@69.04,97.75 cw(c69.04,96.422) 69.979,97.361 ; P3.7 75.529,91.811 92.029,91.811 93.808,90.031 93.808,85.635 U2.43 ; P3.7@69.59,98 ccw(c70.194,98) 69.767,97.573
PB8: P3.6 U2.45 | length 37.6
  Top Layer w0.3: P3.6@66.21,97.533 cw(c65.886,97.011) 66.5,97.011 ; P3.6 66.5,97.011 ; P3.6@66.79,97.533 ccw(c67.114,97.011) 66.5,97.011 ; U2.45 92.333,85.574 92.333,90.058 91.161,91.231 74.502,91.231 69.884,95.848 67.663,95.848 66.5,97.011
PB9: P3.5 U2.46 | length 39.8
  Top Layer w0.3: P3.5@63.571,97.611 cw(c62.632,96.672) 63.96,96.672 cw(c65.288,96.672) P3.5@64.349,97.611 ; P3.5 63.96,96.509 65.218,95.251 69.586,95.251 74.106,90.731 90.457,90.731 91.682,89.505 91.682,85.63 U2.46
PB10: P4.13 U2.21 | length 12.4
  Top Layer w0.3: P4.13 84.28,66.373 86.037,68.131 86.037,75.743 86.2,75.905 U2.21
PB11: P4.14 U2.22 | length 14.7
  Top Layer w0.3: P4.14@86.431,66.089 ccw(c86.175,66.345) 86.537,66.345 ; 86.537,66.986 ccw(c88.106,66.986) P4.14@86.997,65.877 ; 86.537,67.71 ccw(c88.83,67.71) P4.14@87.209,66.089 ; P4.14@86.689,65.367 86.537,65.519 86.537,75.536 U2.22
PB12: P4.15 U2.25 | length 12.5
  Top Layer w0.3: P4.15@88.971,66.089 ccw(c88.032,67.028) 89.36,67.028 ccw(c90.688,67.028) P4.15@89.749,66.089 ; P4.15 89.36,75.035 U2.25
PB13: P4.16 U2.26 | length 12.2
  Top Layer w0.3: U2.26 91.127,75.127 91.127,66.173 ; 91.173,66.127 cw(c90.746,65.7) P4.16@91.35,65.7 ; P4.16@91.571,66.141 cw(c91.368,66.413) 91.127,66.173 ; P4.16 91.127,66.173
PB14: P4.17 U2.27 | length 15.6
  Top Layer w0.3: U2.27 91.627,75.335 91.627,68.213 P4.17 ; 92.989,66.851 ccw(c94.44,68.302) P4.17@94.44,66.25 ; 93.501,66.339 ccw(c94.44,67.278) P4.17@94.44,65.95 ; 93.713,66.127 cw(c93.286,65.7) P4.17@93.89,65.7
PB15: P4.18 U2.28 | length 17.8
  Top Layer w0.3: U2.28 92.127,75.542 92.127,68.663 93.837,66.953 95.427,66.953 P4.18 ; 95.529,66.851 ccw(c96.98,68.302) P4.18@96.98,66.25 ; 96.041,66.339 ccw(c96.98,67.278) P4.18@96.98,65.95 ; 96.253,66.127 cw(c95.826,65.7) P4.18@96.43,65.7
PC13: LED1.2 P3.4 U2.2 | length 38.5
  Top Layer w0.3: P3.4@61.031,97.611 cw(c60.092,96.672) 61.42,96.672 cw(c62.748,96.672) P3.4@61.809,97.611 ; P3.4 61.42,93.65 LED1.2 70.829,93.3 73.898,90.231 85.642,90.231 86.891,88.982 86.891,85.728 U2.2
PC14: C9.2 P4.1 U2.3 Y1.1 | length 69.1
  Top Layer w0.3: Y1.1@78.077,85.545 78.699,86.167 83.113,86.167 83.892,86.947 v1(83.892,87.882) 84.458,88.448 84.458,89.025 C9.2 85.499,89.175 85.744,88.93 85.744,86.167 U2.3
  Bottom Layer w0.3: P4.1 53.8,85.088 59.12,90.408 82.87,90.408 83.892,89.386 v1(83.892,87.882)
PC15: C10.2 P4.2 U2.4 Y1.2 | length 61.5
  Top Layer w0.3: Y1.2 Y1.2@77.933,87.676 ; C10.2 79.973,87.962 79.687,87.676 Y1.2@77.933,87.676 ; v1(81.777,86.912) 78.486,86.912 78.256,87.142 78.256,87.353 Y1.2@77.933,87.676 ; v2@84.534,86.068 84.72,86.254 84.95,86.254 U2.4
  Bottom Layer w0.3: P4.2@55.951,66.089 ccw(c55.012,67.028) 56.34,67.028 ccw(c57.668,67.028) P4.2@56.729,66.089 ; P4.2 56.34,83.953 59.299,86.912 v1(81.777,86.912) 83.834,86.912 v2(84.482,86.264)
VBAT: P3.1 U2.1 | length 60.4
  Top Layer w0.2: U2.1 88.736,85.299 v1@89.502,86.065 ; 88.169,85.44 ccw(c88.51,85.781) 88.51,85.299 ; 88.785,85.348 cw(c89.5,84.634) v1@89.5,85.644 ; 89.127,85.69 cw(c89.5,85.317) v1@89.5,85.844 ; 89.179,85.742 ccw(c89.021,85.9) v1@89.244,85.9
  Bottom Layer w0.2: P3.1 53.8,96.898 55.16,95.538 92.911,95.538 94.448,94 94.448,86.548 93.8,85.9 v1(89.5,85.9) ; v1@89.681,85.719 cw(c90.117,85.283) 90.117,85.9 cw(c90.117,86.517) v1@89.681,86.081
VCC3V3: C1.1 C2.1 C3.1 C4.1 C7.1 C8.1 P1.1 P1.2 P2.1 P2.2 P3.2 R1.1 R2.1 R3.2 R4.1 R5.1 R6.1 R8.2 U1.2 U2.9 U2.24 U2.36 U2.48 | length 197.1
  Top Layer w0.2: U2.9 86.793,80.876 ; 88.81,76.383 88.81,78.859 86.793,80.876 ; U2.48 89.936,85.228 89.204,84.495 89.204,83.004 87.076,80.876 ; U2.36 92.449,80.876 87.076,80.876 ; 86.793,80.876 87.076,80.876
  Top Layer w0.3: R6.1 53.71,72.896 54.139,73.325 62.975,73.325 64.976,71.324 70.602,71.324 71.297,72.019 C4.1 C2.1@71.297,75.984 ; P3.2@55.951,97.611 cw(c55.012,96.672) 56.34,96.672 cw(c57.668,96.672) P3.2@56.729,97.611 ; P3.2 56.34,96.34 54.2,94.2 R3.2 54.2,91.9 54.814,91.286 63.501,91.286 64.071,90.716 68.584,90.716 C7.1 C8.1@72.9,89.7 ; U1.2@64,84.442 64,83.569 64.569,83 67.235,83 68.727,84.492 70.96,84.492 71.297,84.155 C3.1 C1.1 C2.1 C2.1@71.297,75.984 ; 72.354,74.927 ccw(c72.897,75.47) v1@72.897,74.702 ; v1@72.859,74.421 C2.1@71.297,75.984 ; v1@87.882,71.304 ccw(c87.532,71.654) 88.027,71.654 ; 88.027,71.656 ccw(c88.524,71.656) v1@88.173,71.304 ; 88.027,75.249 cw(c88.389,75.249) U2.24@88.133,75.505 ; U2.24 v1(88.027,71.159) v1@88.064,71.121 ; P1.1@93.369,71.773 ccw(c92.089,73.053) 93.899,73.053 ccw(c95.71,73.053) P1.1@94.43,71.773 ; P1.2@93.369,73.252 cw(c92.089,71.972) 93.899,71.972 cw(c95.71,71.972) P1.2@94.43,73.252 ; P1.1@93.581,71.56 ccw(c92.813,72.329) 93.899,72.329 ccw(c94.986,72.329) P1.1@94.218,71.56 ; P1.2@93.581,73.464 cw(c92.813,72.696) 93.899,72.696 cw(c94.986,72.696) P1.2@94.218,73.464 ; P1.1 P1.2 93.899,74.183 94.814,75.098 ; P1.2@93.899,74.532 ccw(c93.899,75.375) 94.495,74.779 ; P1.2@94.318,73.947 cw(c95.036,74.229) 94.49,74.774 ; P1.2@94.597,74.057 cw(c95.5,74.412) 94.814,75.098 ; R8.2@102.697,74.827 R8.2@102.426,75.098 ; P2.1@109.309,92.609 ccw(c108.221,91.521) 108.221,93.06 ccw(c108.221,94.599) P2.1@109.309,93.511 ; P2.1@109.521,92.821 ccw(c108.945,92.245) 108.945,93.06 ccw(c108.945,93.875) P2.1@109.521,93.299 ; P2.1@109.999,92.821 cw(c110.575,92.245) 110.575,93.06 cw(c110.575,93.875) P2.1@109.999,93.299 ; P2.1@110.211,92.609 cw(c111.299,91.521) 111.299,93.06 cw(c111.299,94.599) P2.1@110.211,93.511 ; P2.2@111.849,92.609 ccw(c110.761,91.521) 110.761,93.06 ccw(c110.761,94.599) P2.2@111.849,93.511 ; P2.2@112.061,92.821 ccw(c111.485,92.245) 111.485,93.06 ccw(c111.485,93.875) P2.2@112.061,93.299 ; P2.2 P2.1 103.893,93.06 102.9,92.067 R1.1 R4.1 R5.1 101.517,79.817 101.517,76.008 R8.2@102.426,75.098 ; 94.814,75.098 R8.2@102.426,75.098
  Bottom Layer w0.3: v1@72.752,74.351 cw(c72.401,74) 72.897,74 cw(c73.393,74) v1@73.042,74.351 ; v1(72.897,74.496) 72.897,70.825 76.145,67.577 86.764,67.577 88.027,68.84 v1(88.027,71.159) 93.816,71.159 P1.1 ; v1@87.882,71.013 cw(c87.531,70.662) 88.027,70.662 cw(c88.524,70.662) 88.173,71.013 cw(c88.524,70.662) 88.524,71.159 cw(c88.524,71.655) v1@88.173,71.304 ; 91.887,71.159 ccw(c91.887,73.255) P1.1@93.369,71.773 ; 92.29,71.159 cw(c92.29,69.633) P1.1@93.369,70.712 ; 92.611,71.159 ccw(c92.611,72.53) P1.1@93.581,71.56
pads on no net: J1.0 P2.15 P2.17 P2.19

## Polygon pours and split planes (outlines as drawn)
GND on Bottom Layer (solid, pour order 14): 52.003,100.1 52.003,63.7 115.9,63.7 115.9,100.1
GND on Top Layer (solid, pour order 16): 52.003,100.1 52.003,63.7 115.9,63.7 115.9,100.1

## Keep-outs
Keep-Out Layer:
  lines w0.254: 52.003,63.7 52.003,100.1 115.9,100.1 115.9,63.7 52.003,63.7

## Silkscreen, mask and mechanical layers (free items; w line width, h text height)
Top Overlay:
  lines w0.15: 52.53,66.67 52.53,69.2 103.33,69.2 103.33,66.67 ; 52.53,97.03 52.53,94.5 103.33,94.5 103.33,97.03
  lines w0.2: 55.07,66.646 55.07,69.13 ; 55.07,94.546 55.07,97.03 ; 57.6,66.7 57.6,69.1 ; 57.6,94.6 57.6,97 ; 60.1,66.7 60.1,69.1 ; 60.1,94.6 60.1,97 ; 62.7,66.7 62.7,69.1 ; 62.7,94.6 62.7,97 ; 65.4,66.7 65.4,69.1 ; 65.4,94.6 65.4,97 ; 67.9,66.7 67.9,69.1 ; 67.9,94.6 67.9,97 ; 70.4,66.7 70.4,69.1 ; 70.4,94.6 70.4,97 ; 73,66.7 73,69.1 ; 73,94.6 73,97 ; 75.6,66.7 75.6,69.1 ; 75.6,94.6 75.6,97 ; 78,66.7 78,69.1 ; 78,94.6 78,97 ; 80.5,66.7 80.5,69.1 ; 80.5,94.6 80.5,97 ; 83,66.7 83,69.1 ; 83,94.6 83,97 ; 85.7,66.7 85.7,69.1 ; 85.7,94.6 85.7,97 ; 88.2,66.7 88.2,69.1 ; 88.2,94.6 88.2,97 ; 90.6,66.7 90.6,69.1 ; 90.6,94.6 90.6,97 ; 93.1,66.7 93.1,69.1 ; 93.1,94.6 93.1,97 ; 95.169,72.512 95.169,74.981 ; 95.8,66.7 95.8,69.1 ; 95.8,94.6 95.8,97 ; 97.685,70.033 97.685,75.061 ; 98.3,66.7 98.3,69.1 ; 98.3,94.6 98.3,97 ; 100.7,66.7 100.7,69.1 ; 100.7,94.6 100.7,97
  lines w0.254: 95.169,72.512 97.62,72.512
  text "5V" at 102.3,95.2 h0.6 r90
  text "5V" at 105.067,95.199 h0.8 r90
  text "GND" at 99.7,95 h0.6 r90
  text "RX1" at 112.852,94.915 h0.8 r90
  text "GND" at 59.2,94.9 h0.6 r90
  text "PB9" at 64.4,94.9 h0.6 r90
  text "PB8" at 67.1,94.9 h0.6 r90
  text "PB7" at 69.5,94.9 h0.6 r90
  text "PB6" at 72.1,94.9 h0.6 r90
  text "PB5" at 74.7,94.9 h0.6 r90
  text "PB4" at 77.2,94.9 h0.6 r90
  text "PB3" at 79.7,94.9 h0.6 r90
  text "PA9" at 97.4,94.9 h0.6 r90
  text "GND" at 107.693,94.844 h0.7 r90
  text "TX1" at 110.178,94.844 h0.8 r90
  text "3V3" at 56.7,94.8 h0.6 r90
  text "PA11" at 92.3,94.8 h0.6 r90
  text "VBAT" at 54.2,94.7 h0.6 r90
  text "PC13" at 61.7,94.7 h0.6 r90
  text "PA15" at 82.2,94.7 h0.6 r90
  text "PA14" at 84.7,94.7 h0.6 r90
  text "PA13" at 87.3,94.7 h0.6 r90
  text "PA12" at 89.7,94.7 h0.6 r90
  text "PA10" at 94.8,94.7 h0.6 r90
  text "0" at 98.82,75.601 h1.2
  text "1" at 91.17,73.169 h1.2
  text "1" at 91.17,70.817 h1.2
  text "STM32F103Cx DEMO BOARD" at 54.321,69.469 h1.2
  text "RESET" at 103.7,67.6 h1
  text "PA0" at 59.2,67.2 h0.6 r90
  text "PA1" at 61.7,67.2 h0.6 r90
  text "PB1" at 82.1,67.2 h0.6 r90
  text "PA2" at 64.3,67.1 h0.6 r90
  text "PA3" at 66.9,67.1 h0.6 r90
  text "PA4" at 69.4,67.1 h0.6 r90
  text "PA5" at 72,67.1 h0.6 r90
  text "PA6" at 74.6,67.1 h0.6 r90
  text "PA7" at 77.1,67.1 h0.6 r90
  text "PB0" at 79.7,67.1 h0.6 r90
  text "PA8" at 99.9,67.1 h0.6 r90
  text "GND" at 102.3,67.1 h0.6 r90
  text "PC14" at 54.1,66.9 h0.6 r90
  text "PC15" at 56.8,66.9 h0.6 r90
  text "PB10" at 84.7,66.9 h0.6 r90
  text "PB11" at 87.3,66.9 h0.6 r90
  text "PB12" at 89.8,66.9 h0.6 r90
  text "PB13" at 92.1,66.9 h0.6 r90
  text "PB14" at 94.8,66.9 h0.6 r90
  text "PB15" at 97.4,66.9 h0.6 r90